# Altium PCB MOSFETPCB.PcbDoc
Units mm, origin at the board's own origin, x right, y up, seen from the top; angles counter-clockwise.
Board outline 38.61 x 29.46 mm, 2 copper layers (Top Layer, Bottom Layer); 8 components, 8 nets, 22 pads, 8 vias.
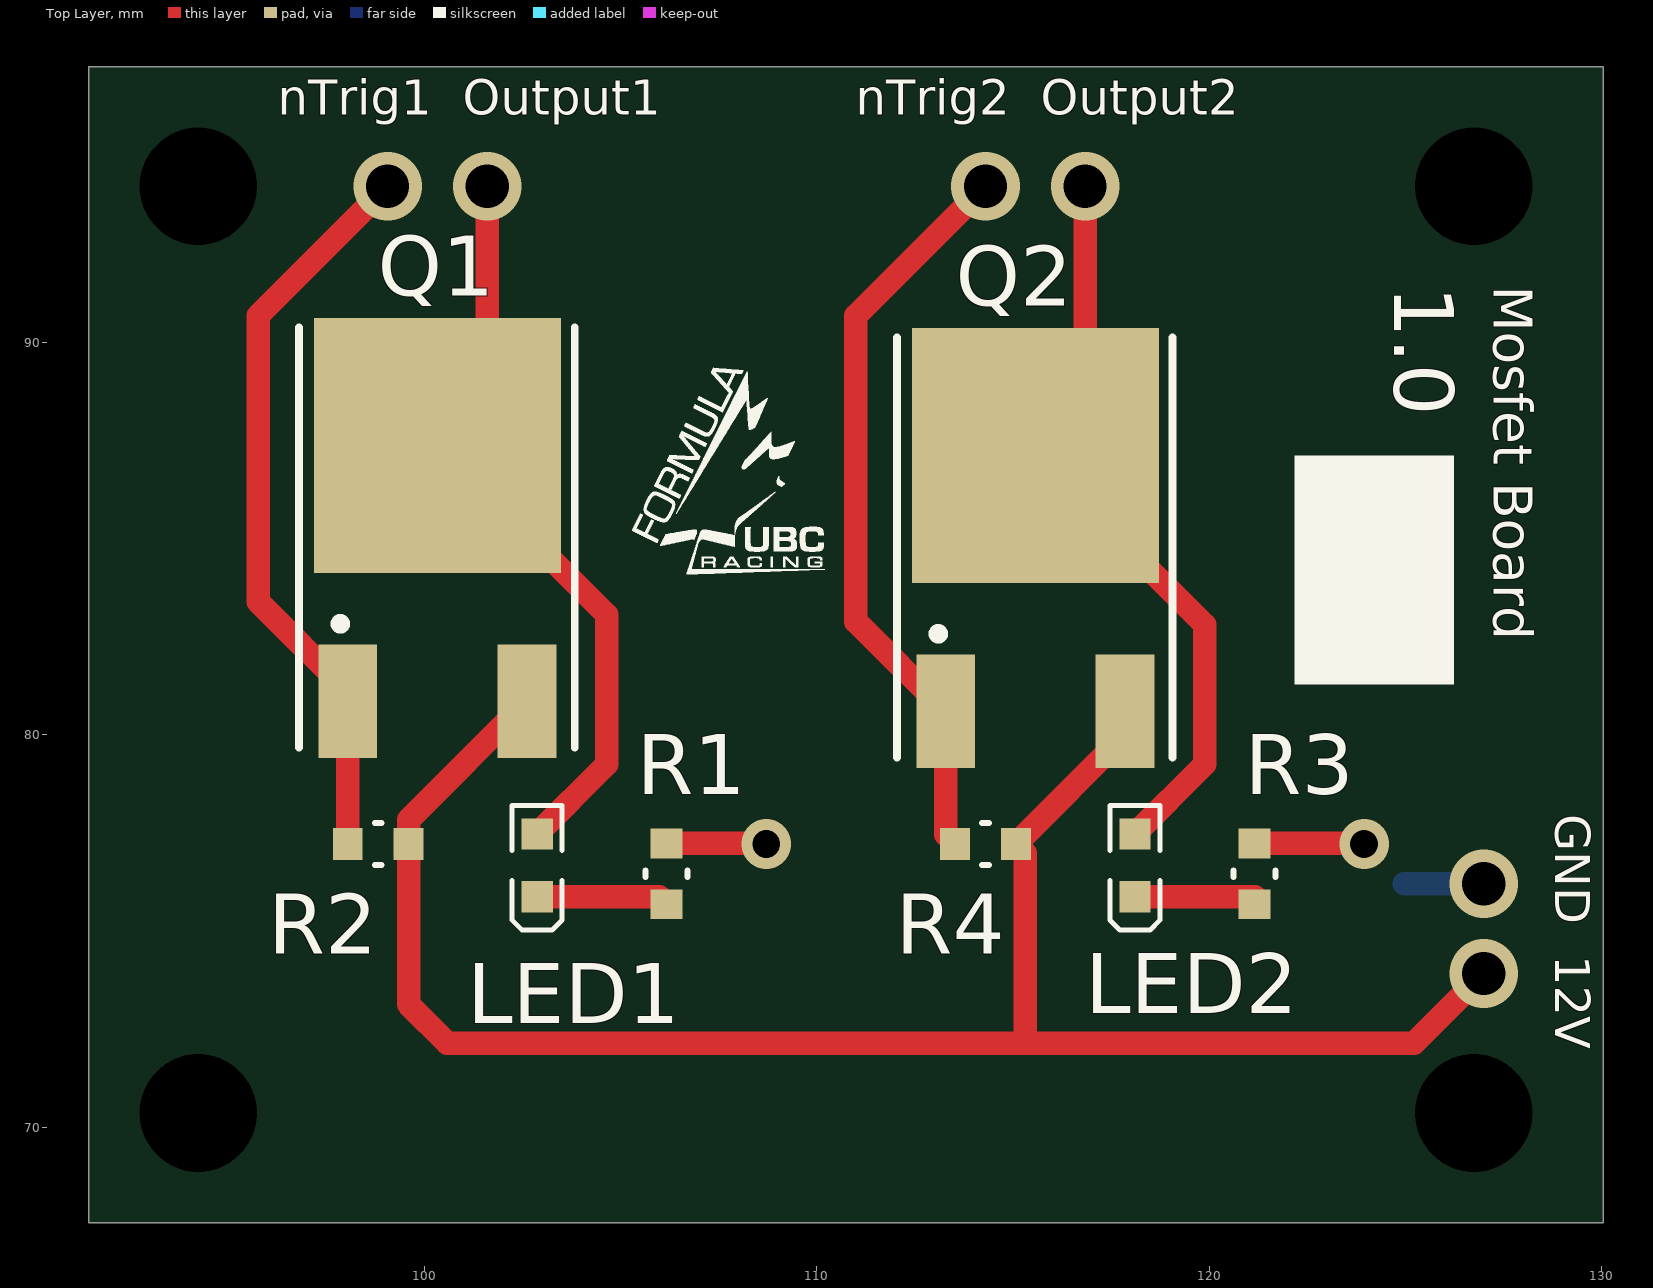
[diagram p0: Top Layer view]
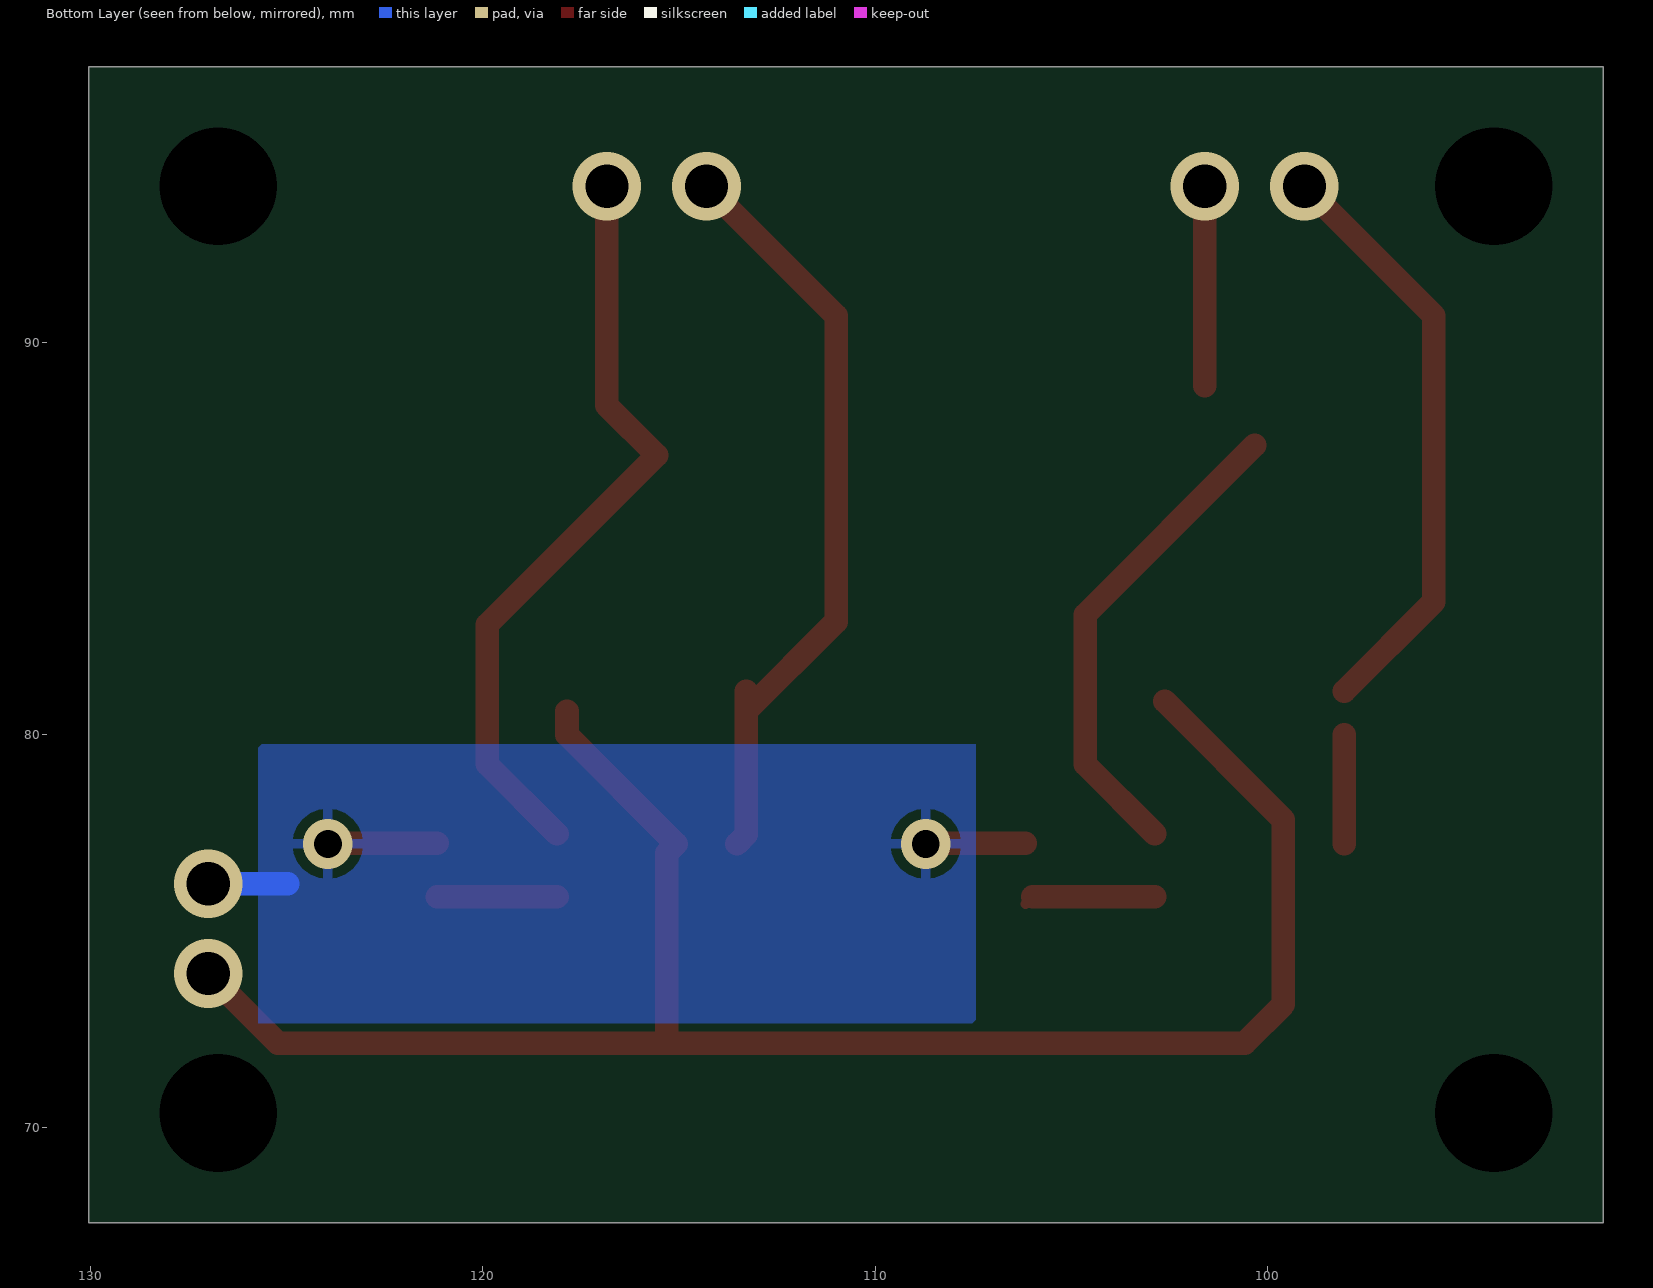
[diagram p1: Bottom Layer view, seen from below]

## Layer stack, top to bottom
Top Solder: solder mask 0.0102, Solder Resist, Dk 3.5
Top Layer: signal copper 0.0356
Dielectric 1: dielectric 0.32, FR-4, Dk 4.8
Bottom Layer: signal copper 0.0356
Bottom Solder: solder mask 0.0102, Solder Resist, Dk 3.5

## Board outline
91.44,67.564 130.048,67.564 130.048,97.028 91.44,97.028

## Design rules (kind name [scope] priority, off if disabled: settings)
Clearance [All] p1: gap=0.254
PolygonConnect [All] p1: connectstyle=Relief reliefconductorwidth=0.254 reliefentries=4 polygonreliefangle="90 Angle" airgapwidth=0.254
RoutingVias [All] p1: holewidth=0.711 width=1.27 viastyle="Through Hole" minholewidth=0.711 minwidth=1.27 maxholewidth=0.711 maxwidth=1.27
SolderMaskExpansion [All] p1: expansion=0.102
UnpouredPolygon [All] p1: allowunpoured=FALSE
Width [All] p1: maxlimit=0.6 minlimit=0.6 preferedwidth=0.6
29 further rules are at their usual default settings.

## Classes and differential pairs
component class Sheet1: LED1 LED2 Q1 Q2 R2 R3 R4

## Components (designator, comment, footprint, x,y, rotation, side; value= is the part's Value field where it differs from the comment)
LED1 "150060BS75000" LED_0603_Red 102.87,76.67 r270 top
LED2 "150060BS75000" LED_0603_Blue 118.11,76.67 r270 top
Q1 "PMOS-2" SIP-G3/C6.75 100.33,84.001 r0 top
Q2 "PMOS-2" SIP-G3/C6.75 115.57,83.747 r0 top
R1 "RC0603JR-07470RL" RC0603N 106.172,76.454 r90 top
R2 "RC0603JR-0782KL" RC0603N 98.819,77.216 r180 top
R3 "RC0603JR-07470RL" RC0603N 121.158,76.454 r90 top
R4 "RC0603JR-0782KL" RC0603N 114.3,77.216 r180 top

## Footprints (in the part's own frame and the unit in brackets; to place one, negate y for a bottom-side part, rotate by r counter-clockwise, add the part's x,y. Pads: shape width x height; smd on the part's side, far side on the other; paste and mask are expansions set on the pad)
LED_0603_Blue [mm] "Chip LED, 2-Leads, Body 1.6x0.8mm, IPC Medium Density"
  rect 0.8x0.8 smd: 1(-0.8,0) 2(0.8,0)
  silkscreen extent -1.52,-0.64 1.65,0.64, body extent -0.8,-0.4 0.8,0.4, height 0.7
LED_0603_Red [mm] "Chip LED, 2-Leads, Body 1.6x0.8mm, IPC Medium Density"
  rect 0.8x0.8 smd: 1(-0.8,0) 2(0.8,0)
  silkscreen extent -1.52,-0.64 1.65,0.64, body extent -0.8,-0.4 0.8,0.4, height 0.7
RC0603N [mil]
  rect 30x32 smd: 1(-30.5,0) 2(30.5,0)
  silkscreen extent -3,-21 3,21
SIP-G3/C6.75 [mm] "D-PAK/TO-252-AA; 3 Leads (1 Cropped); Body 10.1 (inc. leads) x 6.6 mm (LxW max)"
  rect 1.5x2.9 smd: 1(-2.285,-3.15) 3(2.285,-3.15)
  rect 6.3x6.5 smd: 4(0,3.375)
  silkscreen extent -3.52,-4.33 3.5,6.37

## Part data
LED1 LED2: library part "WL-SMCW 0603  150060BS75000", "SMD mono-color Chip LED, WL-SMCW, Blue"
Q1 Q2: "P-Channel Power MOSFET"
R1 R2 R3 R4: "Imported"

## Free pads (board coordinates)
  round 1.524 hole 3: 0(126.746,93.98) 5(94.234,70.358) 6(94.234,93.98) 7(126.746,70.358)

## Via types
v1: diameter 1.75, hole 1.1, Top Layer to Bottom Layer, 6 vias
v2: diameter 1.27, hole 0.711, Top Layer to Bottom Layer, 2 vias

## Nets (pads, with @x,y where several pads share a name; then routed paths per layer and width w, separated by ;. In a path a pad name is that pad's centre, name@x,y a point inside that pad or via, vN(x,y) a via of type N, cw(c..) or ccw(c..) an arc to the next point about the centre after c; other vN are vias at no path point)
12V: Q1.3 Q2.3 R2.1 R4.1 | length 47.2
  Top Layer w0.6: Q1.3 99.593,77.829 R2.1 99.593,73.127 100.584,72.136 115.316,72.136 ; Q2.3 117.855,79.996 R4.1 115.316,76.975 115.316,72.136 ; v1(127,73.914) 125.222,72.136 115.316,72.136
GND: R1.2 R3.2 | length 7.1
  Top Layer w0.6: R1.2 v2@108.458,77.229 ; R3.2 v2@123.939,77.229
  Bottom Layer w0.6: 124.968,76.2 v1(127,76.2)
  other v2: 108.712,77.216 123.952,77.216
INPUT1: Q1.1 R2.2 | length 18
  Top Layer w0.6: R2.2 Q1.1@98.044,80.002 ; Q1.1@98.045,81.105 95.758,83.392 95.758,90.678 v1(99.06,93.98)
INPUT2: Q2.1 R4.2 | length 19.7
  Top Layer w0.6: Q2.1@113.285,81.105 Q2.1 ; R4.2 113.285,77.456 Q2.1 ; v1(114.3,93.98) 110.998,90.678 110.998,82.884 Q2.1
NetLED1_2: LED1.2 R1.1 | length 3.4
  Top Layer w0.254: R1.1@105.981,75.87 R1.1
  Top Layer w0.6: LED1.2 R1.1@105.981,75.87
NetLED2_2: LED2.2 R3.1 | length 3
  Top Layer w0.6: LED2.2 R3.1@121.158,75.87
OUTPUT1: LED1.1 Q1.4 | length 17.5
  Top Layer w0.6: Q1.4 104.648,83.058 104.648,79.248 LED1.1 ; Q1.4@101.6,88.9 v1(101.6,93.98)
OUTPUT2: LED2.1 Q2.4 | length 19.6
  Top Layer w0.6: v1(116.84,93.98) 116.84,88.392 Q2.4 119.888,82.804 119.888,79.248 LED2.1

## Polygon pours and split planes (outlines as drawn)
GND on Bottom Layer "GND" (solid, remove dead copper, pour order 4): 107.442,79.756 107.442,72.644 125.73,72.644 125.73,79.756

## Silkscreen, mask and mechanical layers (free items; w line width, h text height)
Top Overlay:
  drawing of 4511 lines, arcs and shapes, not listed
  text "nTrig1  Output1" at 96.266,95.504 h1.52
  text "nTrig2  Output2" at 110.998,95.504 h1.52
  text "1.0" at 124.714,91.44 h1.52 r270
  text "Mosfet Board" at 127.254,91.44 h1 r270
  text "GND  12V" at 128.524,77.978 h1.52 r270
Mechanical 3:
  the board outline again, w0.254